# EAGLE board Lilypad_Arduino_USB-Panel-v11 (EAGLE 6.5.0)
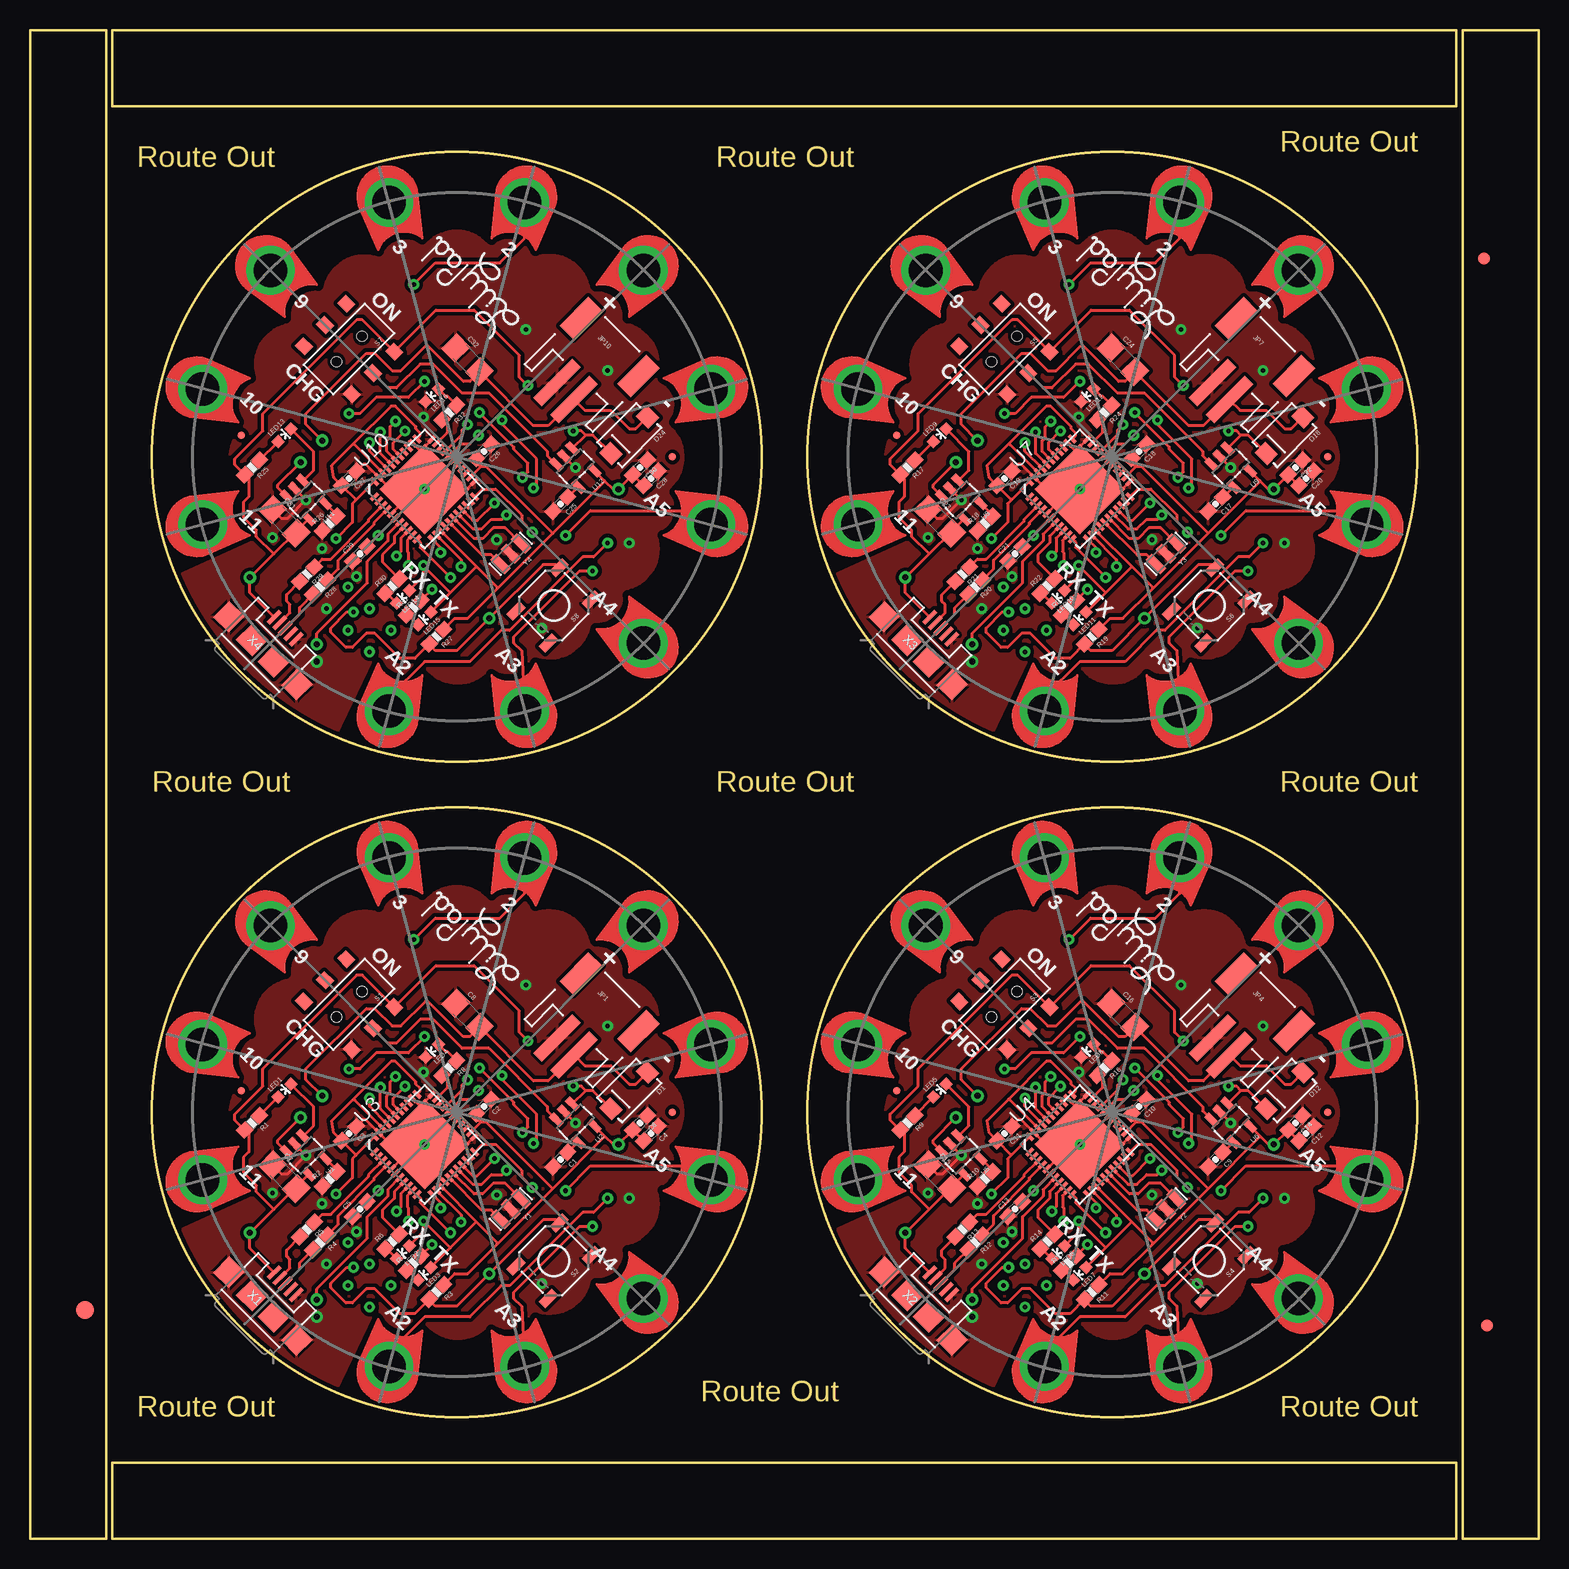
[diagram p0: board, top side]
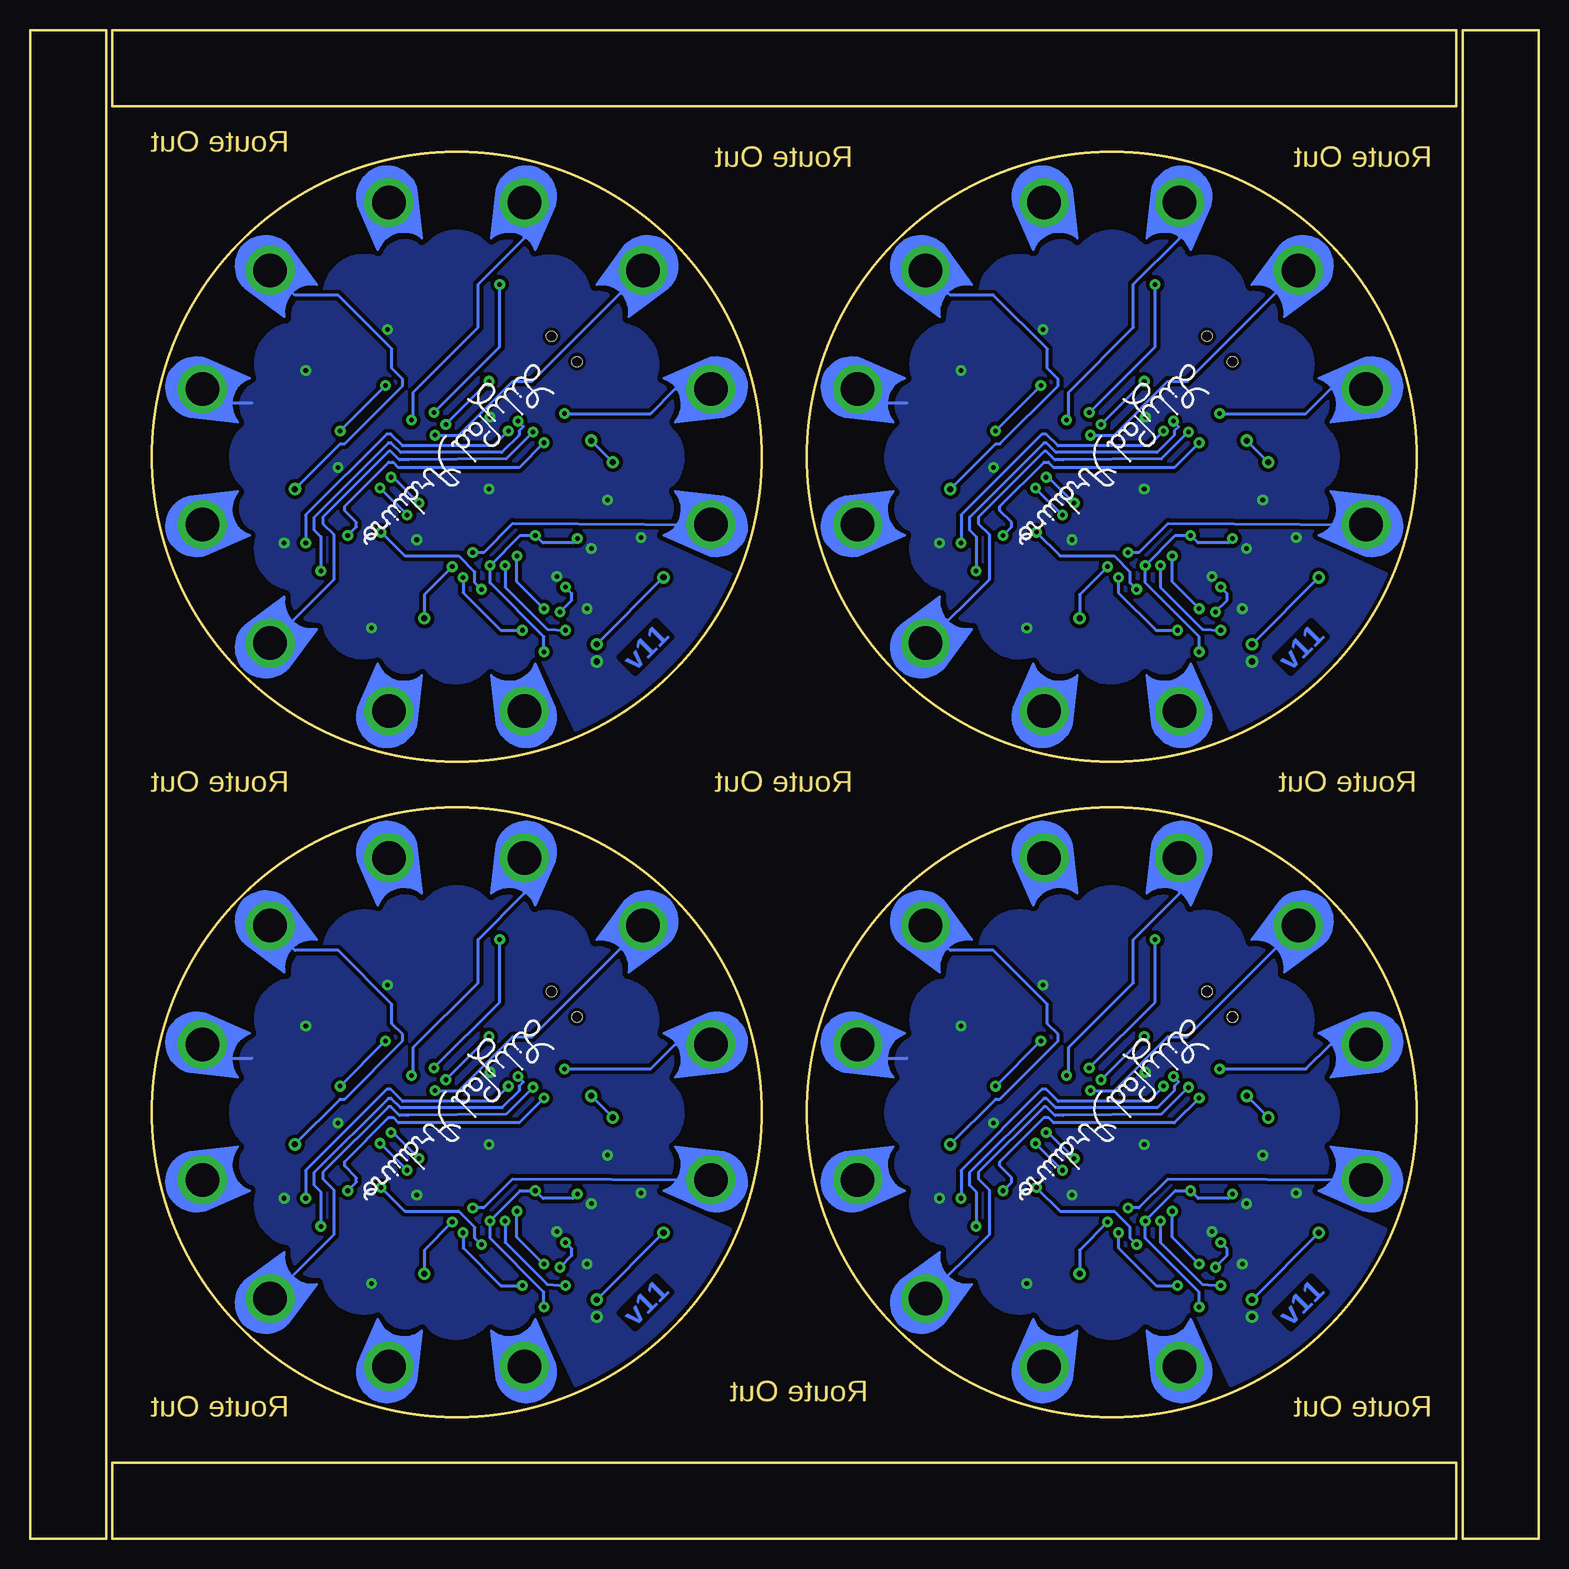
[diagram p1: board, bottom side, seen from below]

Size 125.73 x 125.73 mm. Coordinates in mm from the lower left corner, seen from the top.
Outline: 6.35,99.06 6.35,0 0,0 0,125.73 6.35,125.73 6.35,95.25
Outline: 30.48,6.35 6.86,6.35 6.86,0 118.87,0 118.87,6.35 26.67,6.35
Outline: 119.38,30.48 119.38,0 125.73,0 125.73,125.73 119.38,125.73 119.38,29.21
Outline: 95.25,119.38 118.87,119.38 118.87,125.73 6.86,125.73 6.86,119.38 96.52,119.38
Outline: circle at 35.57,35.56 radius 25.4
Outline: circle at 90.18,35.56 radius 25.4
Outline: circle at 90.18,90.17 radius 25.4
Outline: circle at 35.57,90.17 radius 25.4
Copper layers (1*16): Top 0.035mm / dielectric 1.5mm / Bottom 0.035mm
Design rules "default": minimum track width 8mil, minimum drill 20mil, track to track 8mil, track to pad 8mil, pad to pad 8mil, via to via 8mil, smd to smd 8mil, copper to edge 8mil, drill to drill 8mil, minimum pad ring 12mil, minimum via ring 10mil, stop-mask expansion 4mil, vias tented up to drill 20mil, thermal gap 10mil
tRestrict: area 38.4,10.5 to 45,18.4; area 26.1,52.7 to 32.7,60.6; area 47.2,15.5 to 55.5,24; area 15.6,47.1 to 24,55.6; area 38.5,52.7 to 45.2,60.6; area 10.5,38.5 to 18.4,45.1; area 52.8,26 to 60.7,32.7; area 26,10.5 to 32.7,18.4; area 10.5,26.1 to 18.4,32.7; area 52.7,38.4 to 60.7,45; area 42.1,12.1 to 51.1,21.3; area 32.1,10.1 to 39.1,17.4; 72 more areas
bRestrict: area 47.2,15.5 to 55.5,24; area 15.6,47.1 to 24,55.6; area 38.5,52.7 to 45.2,60.6; area 10.5,38.5 to 18.4,45.1; area 52.8,26 to 60.7,32.7; area 26,10.5 to 32.7,18.4; area 10.5,26.1 to 18.4,32.7; area 52.7,38.4 to 60.7,45; area 42.1,12.1 to 51.1,21.3; area 32.1,10.1 to 39.1,17.4; area 12.1,42.1 to 21.3,51.1; area 10.1,32.1 to 17.4,39.1; 72 more areas

## Footprints (pad centres in the part's own frame; a part is rotated, then mirrored left to right if it is on the bottom)
PETAL-LONG-1-2SIDE = drill 2.794 pad 4.064: 1 0.03,0
0603-CAP = smd 1.1 x 1: 1 -0.85,0; 2 0.85,0
1206 = smd 1.6 x 1.8: 1 -1.4,0; 2 1.4,0
SMA-DIODE = smd 1.27 x 1.47: A -2.15,0; C 2.15,0
FIDUCIAL-1.5X3 = smd 1.5 x 1.5: 1 0,0
FIDUCIAL-1X2 = smd 1 x 1: 1 0,0
JST-2-SMD = smd 1 x 4.6: 1 -1,-3.7; 2 1,-3.7 | smd 1.6 x 3.4: NC1 -3.4,1.5; NC2 3.4,1.5
MICRO-FIDUCIAL = smd 0.635 x 0.635: 1 0,0
LED-0603 = smd 0.8 x 0.8: A 0,-0.75; C 0,0.75
0603-RES = smd 1.1 x 1: 1 -0.85,0; 2 0.85,0
AYZ0202 = smd 1 x 1.15: 1 -2.5,2.825; 2 0,2.825; 3 2.5,2.825; 4 -2.5,-2.825; 5 0,-2.825; 6 2.5,-2.825 | hole 0.85: 1.5,0; -1.5,0
TACTILE_SWITCH_SMD = smd 1.524 x 0.762: 1 -2.54,1.905; 2 2.54,1.905; 3 -2.54,-1.905; 4 2.54,-1.905
SOT23-5 = smd 0.55 x 1.2: 1 -0.95,-1.3; 2 0,-1.3; 3 0.95,-1.3; 4 0.95,1.3; 5 -0.95,1.3
QFN-44 = smd 0.8 x 0.3: 1 -3.4,2.5; 2 -3.4,2; 3 -3.4,1.5; 4 -3.4,1; 5 -3.4,0.5; 6 -3.4,0; 7 -3.4,-0.5; 8 -3.4,-1; 9 -3.4,-1.5; 10 -3.4,-2; 11 -3.4,-2.5; 23 3.4,-2.5; 24 3.4,-2; 25 3.4,-1.5; 26 3.4,-1; 27 3.4,-0.5; 28 3.4,0; 29 3.4,0.5; 30 3.4,1; 31 3.4,1.5; 32 3.4,2; 33 3.4,2.5 | smd 0.3 x 0.8: 12 -2.5,-3.4; 13 -2,-3.4; 14 -1.5,-3.4; 15 -1,-3.4; 16 -0.5,-3.4; 17 0,-3.4; 18 0.5,-3.4; 19 1,-3.4; 20 1.5,-3.4; 21 2,-3.4; 22 2.5,-3.4; 34 2.5,3.4; 35 2,3.4; 36 1.5,3.4; 37 1,3.4; 38 0.5,3.4; 39 0,3.4; 40 -0.5,3.4; 41 -1,3.4; 42 -1.5,3.4; 43 -2,3.4; 44 -2.5,3.4 | smd 5.3 x 5.3: EPAD 0,0
USB-MICROB = smd 0.35 x 1.4: D+ 0,2.65; D- -0.65,2.65; GND 1.3,2.65; ID 0.65,2.65; VBUS -1.3,2.65 | smd 1.8 x 1.9: MT1 -4,0; MT2 4,0 | smd 1.9 x 1.9: P$1 -1.27,0; P$2 1.27,0
RESONATOR-SMD = smd 0.7 x 1.7: 1 -1.2,0; 2 0,0; 3 1.2,0

## Placement (x,y rotation side)
+  SEWTAP9  [PETAL-LONG-1-2SIDE]  51.13,51.11 225 top
+1  SEWTAP9  [PETAL-LONG-1-2SIDE]  105.74,51.11 225 top
+2  SEWTAP9  [PETAL-LONG-1-2SIDE]  105.74,105.72 225 top
+3  SEWTAP9  [PETAL-LONG-1-2SIDE]  51.13,105.72 225 top
-  SEWTAP9  [PETAL-LONG-1-2SIDE]  56.78,41.21 195 top
-1  SEWTAP9  [PETAL-LONG-1-2SIDE]  111.39,41.21 195 top
-2  SEWTAP9  [PETAL-LONG-1-2SIDE]  111.39,95.82 195 top
-3  SEWTAP9  [PETAL-LONG-1-2SIDE]  56.78,95.82 195 top
A1  SEWTAP9  [PETAL-LONG-1-2SIDE]  84.52,14.34 75 top
A2  SEWTAP9  [PETAL-LONG-1-2SIDE]  29.91,14.34 75 top
A3  SEWTAP9  [PETAL-LONG-1-2SIDE]  41.23,14.34 105 top
A4  SEWTAP9  [PETAL-LONG-1-2SIDE]  51.13,20 135 top
A5  SEWTAP9  [PETAL-LONG-1-2SIDE]  56.78,29.9 165 top
A6  SEWTAP9  [PETAL-LONG-1-2SIDE]  95.84,14.34 105 top
A7  SEWTAP9  [PETAL-LONG-1-2SIDE]  111.39,29.9 165 top
A8  SEWTAP9  [PETAL-LONG-1-2SIDE]  105.74,20 135 top
A9  SEWTAP9  [PETAL-LONG-1-2SIDE]  84.52,68.95 75 top
A10  SEWTAP9  [PETAL-LONG-1-2SIDE]  95.84,68.95 105 top
A11  SEWTAP9  [PETAL-LONG-1-2SIDE]  111.39,84.51 165 top
A12  SEWTAP9  [PETAL-LONG-1-2SIDE]  105.74,74.61 135 top
A13  SEWTAP9  [PETAL-LONG-1-2SIDE]  29.91,68.95 75 top
A14  SEWTAP9  [PETAL-LONG-1-2SIDE]  41.23,68.95 105 top
A15  SEWTAP9  [PETAL-LONG-1-2SIDE]  56.78,84.51 165 top
A16  SEWTAP9  [PETAL-LONG-1-2SIDE]  51.13,74.61 135 top
C1  470pF  [0603-CAP]  44.19,31.61 225 top
C2  .1uF  [0603-CAP]  37.82,36.01 225 top
C3  .1uF  [0603-CAP]  26.59,33.76 225 top
C4  .1uF  [0603-CAP]  51.73,33.76 225 top
C5  1uF  [0603-CAP]  27.49,27.47 45 top
C6  4.7uF  [0603-CAP]  50.84,34.66 225 top
C7  4.7uF  [1206]  21.2,30.17 315 top
C8  4.7uF  [1206]  36.47,43.64 315 top
C9  470pF  [0603-CAP]  98.8,31.61 225 top
C10  .1uF  [0603-CAP]  92.43,36.01 225 top
C11  .1uF  [0603-CAP]  81.2,33.76 225 top
C12  .1uF  [0603-CAP]  106.34,33.76 225 top
C13  1uF  [0603-CAP]  82.1,27.47 45 top
C14  4.7uF  [0603-CAP]  105.45,34.66 225 top
C15  4.7uF  [1206]  75.81,30.17 315 top
C16  4.7uF  [1206]  91.08,43.64 315 top
C17  470pF  [0603-CAP]  98.8,86.22 225 top
C18  .1uF  [0603-CAP]  92.43,90.62 225 top
C19  .1uF  [0603-CAP]  81.2,88.37 225 top
C20  .1uF  [0603-CAP]  106.34,88.37 225 top
C21  1uF  [0603-CAP]  82.1,82.08 45 top
C22  4.7uF  [0603-CAP]  105.45,89.27 225 top
C23  4.7uF  [1206]  75.81,84.78 315 top
C24  4.7uF  [1206]  91.08,98.25 315 top
C25  470pF  [0603-CAP]  44.19,86.22 225 top
C26  .1uF  [0603-CAP]  37.82,90.62 225 top
C27  .1uF  [0603-CAP]  26.59,88.37 225 top
C28  .1uF  [0603-CAP]  51.73,88.37 225 top
C29  1uF  [0603-CAP]  27.49,82.08 45 top
C30  4.7uF  [0603-CAP]  50.84,89.27 225 top
C31  4.7uF  [1206]  21.2,84.78 315 top
C32  4.7uF  [1206]  36.47,98.25 315 top
D1  B340A  [SMA-DIODE]  49.94,37.35 225 top
D2  SEWTAP9  [PETAL-LONG-1-2SIDE]  95.84,56.77 255 top
D3  SEWTAP9  [PETAL-LONG-1-2SIDE]  74.62,51.11 315 top
D4  SEWTAP9  [PETAL-LONG-1-2SIDE]  84.52,56.77 285 top
D5  SEWTAP9  [PETAL-LONG-1-2SIDE]  41.23,56.77 255 top
D6  SEWTAP9  [PETAL-LONG-1-2SIDE]  29.91,56.77 285 top
D7  SEWTAP9  [PETAL-LONG-1-2SIDE]  68.97,41.21 345 top
D8  SEWTAP9  [PETAL-LONG-1-2SIDE]  68.97,29.9 15 top
D9  SEWTAP9  [PETAL-LONG-1-2SIDE]  20.01,51.11 315 top
D10  SEWTAP9  [PETAL-LONG-1-2SIDE]  14.36,41.21 345 top
D11  SEWTAP9  [PETAL-LONG-1-2SIDE]  14.36,29.9 15 top
D12  B340A  [SMA-DIODE]  104.55,37.35 225 top
D13  SEWTAP9  [PETAL-LONG-1-2SIDE]  95.84,111.38 255 top
D14  SEWTAP9  [PETAL-LONG-1-2SIDE]  74.62,105.72 315 top
D15  SEWTAP9  [PETAL-LONG-1-2SIDE]  84.52,111.38 285 top
D16  SEWTAP9  [PETAL-LONG-1-2SIDE]  68.97,95.82 345 top
D17  SEWTAP9  [PETAL-LONG-1-2SIDE]  68.97,84.51 15 top
D18  B340A  [SMA-DIODE]  104.55,91.96 225 top
D19  SEWTAP9  [PETAL-LONG-1-2SIDE]  41.23,111.38 255 top
D20  SEWTAP9  [PETAL-LONG-1-2SIDE]  20.01,105.72 315 top
D21  SEWTAP9  [PETAL-LONG-1-2SIDE]  29.91,111.38 285 top
D22  SEWTAP9  [PETAL-LONG-1-2SIDE]  14.36,95.82 345 top
D23  SEWTAP9  [PETAL-LONG-1-2SIDE]  14.36,84.51 15 top
D24  B340A  [SMA-DIODE]  49.94,91.96 225 top
E$1  [FIDUCIAL-1.5X3]  4.57,19.05 0 top
E$4  [FIDUCIAL-1X2]  121.41,17.78 0 top
E$5  [FIDUCIAL-1X2]  121.16,106.68 180 top
JP1  JST-2  [JST-2-SMD]  47.24,43.64 315 top
JP2  FIDUCIALUFIDUCIAL  [MICRO-FIDUCIAL]  53.53,35.56 135 top
JP3  FIDUCIALUFIDUCIAL  [MICRO-FIDUCIAL]  17.61,37.35 135 top
JP4  JST-2  [JST-2-SMD]  101.85,43.64 315 top
JP5  FIDUCIALUFIDUCIAL  [MICRO-FIDUCIAL]  108.14,35.56 135 top
JP6  FIDUCIALUFIDUCIAL  [MICRO-FIDUCIAL]  72.22,37.35 135 top
JP7  JST-2  [JST-2-SMD]  101.85,98.25 315 top
JP8  FIDUCIALUFIDUCIAL  [MICRO-FIDUCIAL]  108.14,90.17 135 top
JP9  FIDUCIALUFIDUCIAL  [MICRO-FIDUCIAL]  72.22,91.96 135 top
JP10  JST-2  [JST-2-SMD]  47.24,98.25 315 top
JP11  FIDUCIALUFIDUCIAL  [MICRO-FIDUCIAL]  53.53,90.17 135 top
JP12  FIDUCIALUFIDUCIAL  [MICRO-FIDUCIAL]  17.61,91.96 135 top
LED1  RED  [LED-0603]  21.2,37.35 315 top
LED2  RED  [LED-0603]  31.08,23.88 135 top
LED3  RED  [LED-0603]  32.88,22.09 135 top
LED4  RED  [LED-0603]  33.5,40.68 135 top
LED5  RED  [LED-0603]  75.81,37.35 315 top
LED6  RED  [LED-0603]  85.69,23.88 135 top
LED7  RED  [LED-0603]  87.49,22.09 135 top
LED8  RED  [LED-0603]  88.11,40.68 135 top
LED9  RED  [LED-0603]  75.81,91.96 315 top
LED10  RED  [LED-0603]  85.69,78.49 135 top
LED11  RED  [LED-0603]  87.49,76.7 135 top
LED12  RED  [LED-0603]  88.11,95.29 135 top
LED13  RED  [LED-0603]  21.2,91.96 315 top
LED14  RED  [LED-0603]  31.08,78.49 135 top
LED15  RED  [LED-0603]  32.88,76.7 135 top
LED16  RED  [LED-0603]  33.5,95.29 135 top
R1  330  [0603-RES]  18.51,34.66 225 top
R2  10k  [0603-RES]  24.97,29.99 45 top
R3  10k  [0603-RES]  33.86,20.56 225 top
R4  22  [0603-RES]  24.17,24.69 225 top
R5  22  [0603-RES]  23.09,25.77 225 top
R6  330  [0603-RES]  30.18,24.78 45 top
R7  330  [0603-RES]  31.98,22.98 45 top
R8  330  [0603-RES]  34.94,39.24 225 top
R9  330  [0603-RES]  73.12,34.66 225 top
R10  10k  [0603-RES]  79.58,29.99 45 top
R11  10k  [0603-RES]  88.47,20.56 225 top
R12  22  [0603-RES]  78.78,24.69 225 top
R13  22  [0603-RES]  77.7,25.77 225 top
R14  330  [0603-RES]  84.79,24.78 45 top
R15  330  [0603-RES]  86.59,22.98 45 top
R16  330  [0603-RES]  89.55,39.24 225 top
R17  330  [0603-RES]  73.12,89.27 225 top
R18  10k  [0603-RES]  79.58,84.6 45 top
R19  10k  [0603-RES]  88.47,75.17 225 top
R20  22  [0603-RES]  78.78,79.3 225 top
R21  22  [0603-RES]  77.7,80.38 225 top
R22  330  [0603-RES]  84.79,79.39 45 top
R23  330  [0603-RES]  86.59,77.59 45 top
R24  330  [0603-RES]  89.55,93.85 225 top
R25  330  [0603-RES]  18.51,89.27 225 top
R26  10k  [0603-RES]  24.97,84.6 45 top
R27  10k  [0603-RES]  33.86,75.17 225 top
R28  22  [0603-RES]  24.17,79.3 225 top
R29  22  [0603-RES]  23.09,80.38 225 top
R30  330  [0603-RES]  30.18,79.39 45 top
R31  330  [0603-RES]  31.98,77.59 45 top
R32  330  [0603-RES]  34.94,93.85 225 top
S1  SWITCH-DPDTSMD  [AYZ0202]  26.59,44.54 225 top
S2  !RESET  [TACTILE_SWITCH_SMD]  43.65,23.16 225 top
S3  SWITCH-DPDTSMD  [AYZ0202]  81.2,44.54 225 top
S4  !RESET  [TACTILE_SWITCH_SMD]  98.26,23.16 225 top
S5  SWITCH-DPDTSMD  [AYZ0202]  81.2,99.15 225 top
S6  !RESET  [TACTILE_SWITCH_SMD]  98.26,77.77 225 top
S7  SWITCH-DPDTSMD  [AYZ0202]  26.59,99.15 225 top
S8  !RESET  [TACTILE_SWITCH_SMD]  43.65,77.77 225 top
U1  MCP73831  [SOT23-5]  23,31.96 225 top
U2  MIC5219  [SOT23-5]  45.45,34.66 225 top
U3  ATMEGA32U4QFN  [QFN-44]  32.88,32.86 45 top
U4  ATMEGA32U4QFN  [QFN-44]  87.49,32.86 45 top
U5  MCP73831  [SOT23-5]  77.61,31.96 225 top
U6  MIC5219  [SOT23-5]  100.06,34.66 225 top
U7  ATMEGA32U4QFN  [QFN-44]  87.49,87.47 45 top
U8  MCP73831  [SOT23-5]  77.61,86.57 225 top
U9  MIC5219  [SOT23-5]  100.06,89.27 225 top
U10  ATMEGA32U4QFN  [QFN-44]  32.88,87.47 45 top
U11  MCP73831  [SOT23-5]  23,86.57 225 top
U12  MIC5219  [SOT23-5]  45.45,89.27 225 top
U$1  LOGO-LPLPA  [LOGO-LPA]  35.57,35.56 225 bottom
U$2  LOGO-LPLP  [LOGO-LILYPAD]  91.35,49.84 135 top
U$3  LOGO-LPLPA  [LOGO-LPA]  90.18,35.56 225 bottom
U$4  LOGO-LPLP  [LOGO-LILYPAD]  91.35,104.45 135 top
U$5  LOGO-LPLPA  [LOGO-LPA]  90.18,90.17 225 bottom
U$6  LOGO-LPLP  [LOGO-LILYPAD]  36.74,104.45 135 top
U$7  LOGO-LPLPA  [LOGO-LPA]  35.57,90.17 225 bottom
U$13  LOGO-LPLP  [LOGO-LILYPAD]  36.74,49.84 135 top
X1  USB-MICROB  [USB-MICROB]  19.41,19.39 315 top
X2  USB-MICROB  [USB-MICROB]  74.02,19.39 315 top
X3  USB-MICROB  [USB-MICROB]  74.02,74 315 top
X4  USB-MICROB  [USB-MICROB]  19.41,74 315 top
Y1  8MHz  [RESONATOR-SMD]  40.06,27.47 225 top
Y2  8MHz  [RESONATOR-SMD]  94.67,27.47 225 top
Y3  8MHz  [RESONATOR-SMD]  94.67,82.08 225 top
Y4  8MHz  [RESONATOR-SMD]  40.06,82.08 225 top

## Library data of the parts
+ +1-+3 - -1--3 A1-A16 D2-D11 D13-D17 D19-D23 U$2 U$4 U$6 U$13 = LilyPad-Wearables; NO_PART: 1
C1 C9 C17 C25 = SparkFun-Passives; PROD_ID: CAP-07884
C2-C4 C10-C12 C18-C20 C26-C28 = SparkFun-Passives; PROD_ID: CAP-00810
C5 C13 C21 C29 = SparkFun-Passives; PROD_ID: CAP-00868
C6 C14 C22 C30 = SparkFun-Passives; PROD_ID: CAP-08280
C7 C8 C15 C16 C23 C24 C31 C32 = SparkFun-Passives; PROD_ID: CAP-10300
D1 D12 D18 D24 = SparkFun-DiscreteSemi; PROD_ID: DIO-09886
E$1 E$4 E$5 = SparkFun-Aesthetics
JP1 JP4 JP7 JP10 = SparkFun-Connectors; PROD_ID: CONN-08352
JP2 JP3 JP5 JP6 JP8 JP9 JP11 JP12 = SparkFun
LED1-LED16 = SparkFun-LED; PROD_ID: DIO-00819
R1 R6-R9 R14-R17 R22-R25 R30-R32 = SparkFun-Passives; PROD_ID: RES-00818
R2 R3 R10 R11 R18 R19 R26 R27 = SparkFun-Passives; PROD_ID: RES-00824
R4 R5 R12 R13 R20 R21 R28 R29 = SparkFun-Passives; PROD_ID: RES-08698
S1 S3 S5 S7 = SparkFun-Electromechanical; PROD_ID: SWCH-08179
S2 S4 S6 S8 = SparkFun-Electromechanical; PROD_ID: SWCH-08247
U1 U5 U8 U11 = SparkFun-PowerIC; PROD_ID: IC-09995
U2 U6 U9 U12 = SparkFun-PowerIC; PROD_ID: VREG-09872
U3 U4 U7 U10 = SparkFun-DigitalIC; PROD_ID: IC-10828
U$1 U$3 U$5 U$7 = LilyPad-Wearables
X1-X4 = SparkFun-Connectors; PROD_ID: CONN-09505
Y1-Y4 = SparkFun-FreqCtrl; PROD_ID: XTAL-08895

## Nets
3.3V: +.1 C2.2 C3.2 C4.2 C5.2 C6.2 LED2.A LED3.A R3.1 U2.5 U3.6 U3.14 U3.24 U3.34 U3.42 U3.44
3.3V1: +1.1 C10.2 C11.2 C12.2 C13.2 C14.2 LED6.A LED7.A R11.1 U4.6 U4.14 U4.24 U4.34 U4.42 U4.44 U6.5
3.3V2: +2.1 C18.2 C19.2 C20.2 C21.2 C22.2 LED10.A LED11.A R19.1 U7.6 U7.14 U7.24 U7.34 U7.42 U7.44 U9.5
3.3V3: +3.1 C26.2 C27.2 C28.2 C29.2 C30.2 LED14.A LED15.A R27.1 U10.6 U10.14 U10.24 U10.34 U10.42 U10.44 U12.5
5V: C7.2 D1.C R1.2 S1.1 U1.4 U2.1 U3.7 X1.VBUS
5V1: C15.2 D12.C R9.2 S3.1 U4.7 U5.4 U6.1 X2.VBUS
5V2: C23.2 D18.C R17.2 S5.1 U7.7 U8.4 U9.1 X3.VBUS
5V3: C31.2 D24.C R25.2 S7.1 U10.7 U11.4 U12.1 X4.VBUS
D+: R4.1 U3.4
D+1: R12.1 U4.4
D+2: R20.1 U7.4
D+3: R28.1 U10.4
D-: R5.1 U3.3
D-1: R13.1 U4.3
D-2: R21.1 U7.3
D-3: R29.1 U10.3
GND: -.1 C1.2 C2.1 C3.1 C4.1 C5.1 C6.1 C7.1 C8.1 JP1.1 LED4.C R2.1 S1.3 S2.1 U1.2 U2.2 U3.5 U3.15 U3.23 U3.33 U3.35 U3.43 U3.EPAD X1.GND X1.MT1 X1.MT2 Y1.2
GND1: -1.1 C9.2 C10.1 C11.1 C12.1 C13.1 C14.1 C15.1 C16.1 JP4.1 LED8.C R10.1 S3.3 S4.1 U4.5 U4.15 U4.23 U4.33 U4.35 U4.43 U4.EPAD U5.2 U6.2 X2.GND X2.MT1 X2.MT2 Y2.2
GND2: -2.1 C17.2 C18.1 C19.1 C20.1 C21.1 C22.1 C23.1 C24.1 JP7.1 LED12.C R18.1 S5.3 S6.1 U7.5 U7.15 U7.23 U7.33 U7.35 U7.43 U7.EPAD U8.2 U9.2 X3.GND X3.MT1 X3.MT2 Y3.2
GND3: -3.1 C25.2 C26.1 C27.1 C28.1 C29.1 C30.1 C31.1 C32.1 JP10.1 LED16.C R26.1 S7.3 S8.1 U10.5 U10.15 U10.23 U10.33 U10.35 U10.43 U10.EPAD U11.2 U12.2 X4.GND X4.MT1 X4.MT2 Y4.2
MISO: U3.11
MISO1: U4.11
MISO2: U7.11
MISO3: U10.11
MOSI: U3.10
MOSI1: U4.10
MOSI2: U7.10
MOSI3: U10.10
N$1: LED2.C R6.1
N$2: S1.2 U2.3
N$3: LED1.A R1.1
N$4: LED1.C U1.1
N$5: U3.17 Y1.1
N$6: R2.2 U1.5
N$7: U3.16 Y1.3
N$8: C1.1 U2.4
N$9: D11.1 U3.12
N$10: D10.1 U3.30
N$11: D9.1 U3.29
N$12: D5.1 U3.19
N$13: D6.1 U3.18
N$14: A5.1 U3.41
N$15: A4.1 U3.40
N$16: A3.1 U3.39
N$17: A2.1 U3.38
N$18: LED4.A R8.1
N$19: R5.2 X1.D-
N$20: R4.2 X1.D+
N$21: LED3.C R7.1
N$22: S3.2 U6.3
N$23: LED5.A R9.1
N$24: LED5.C U5.1
N$25: R10.2 U5.5
N$26: C9.1 U6.4
N$27: D8.1 U4.12
N$28: D7.1 U4.30
N$29: D3.1 U4.29
N$30: A7.1 U4.41
N$31: A8.1 U4.40
N$32: A6.1 U4.39
N$33: A1.1 U4.38
N$34: R13.2 X2.D-
N$35: R12.2 X2.D+
N$36: LED6.C R14.1
N$37: LED7.C R15.1
N$38: U4.17 Y2.1
N$39: U4.16 Y2.3
N$40: D2.1 U4.19
N$41: D4.1 U4.18
N$42: LED8.A R16.1
N$43: S5.2 U9.3
N$44: LED9.A R17.1
N$45: LED9.C U8.1
N$46: R18.2 U8.5
N$47: C17.1 U9.4
N$48: D17.1 U7.12
N$49: D16.1 U7.30
N$50: D14.1 U7.29
N$51: A11.1 U7.41
N$52: A12.1 U7.40
N$53: A10.1 U7.39
N$54: A9.1 U7.38
N$55: R21.2 X3.D-
N$56: R20.2 X3.D+
N$57: LED10.C R22.1
N$58: LED11.C R23.1
N$59: U7.17 Y3.1
N$60: U7.16 Y3.3
N$61: D13.1 U7.19
N$62: D15.1 U7.18
N$63: LED12.A R24.1
N$64: S7.2 U12.3
N$65: LED13.A R25.1
N$66: LED13.C U11.1
N$67: R26.2 U11.5
N$68: C25.1 U12.4
N$69: D23.1 U10.12
N$70: D22.1 U10.30
N$71: D20.1 U10.29
N$72: A15.1 U10.41
N$73: A16.1 U10.40
N$74: A14.1 U10.39
N$75: A13.1 U10.38
N$76: R29.2 X4.D-
N$77: R28.2 X4.D+
N$78: LED14.C R30.1
N$79: LED15.C R31.1
N$80: U10.17 Y4.1
N$81: U10.16 Y4.3
N$82: D19.1 U10.19
N$83: D21.1 U10.18
N$84: LED16.A R32.1
RESET: R3.2 S2.3 U3.13
RESET1: R11.2 S4.3 U4.13
RESET2: R19.2 S6.3 U7.13
RESET3: R27.2 S8.3 U10.13
RX_LED: R6.2 U3.8
RX_LED1: R14.2 U4.8
RX_LED2: R22.2 U7.8
RX_LED3: R30.2 U10.8
SCK: U3.9
SCK1: U4.9
SCK2: U7.9
SCK3: U10.9
TX_LED: R7.2 U3.22
TX_LED1: R15.2 U4.22
TX_LED2: R23.2 U7.22
TX_LED3: R31.2 U10.22
USER_LED: R8.2 U3.32
USER_LED1: R16.2 U4.32
USER_LED2: R24.2 U7.32
USER_LED3: R32.2 U10.32
V_BATT: C8.2 D1.A JP1.2 U1.3
V_BATT1: C16.2 D12.A JP4.2 U5.3
V_BATT2: C24.2 D18.A JP7.2 U8.3
V_BATT3: C32.2 D24.A JP10.2 U11.3

## Tracks (layer width: path | path; a pad name or v marks a point on that pad's centre or on a via)
3.3V  (via drill 0.38, 0.51)
  Top 0.254: 47.25,34.21 U2.5 47.87,33.58 | 43.56,29.18 47.87,33.49 47.87,33.58 | U3.44 27.15,31.94 | 27.15,31.94 26.86,31.66 26.86,30.08 v25.51,28.73 | 26.95,36.64 30.09,39.78 30.45,39.78 32.16,38.07 32.16,37.89 32.52,37.53 32.52,37.31 U3.34 | 26.95,36.64 25.15,34.84 25.33,33.82 C3.2 27.13,32.02 27.13,31.97 27.15,31.94 | U3.42 27.07,36.55 26.95,36.64 | U3.6 v29.02,29 C5.2 | LED3.A 35.03,24.24 | 35.03,24.24 37.19,26.4 37.19,26.43 | U3.14 37.19,26.43 | LED2.A 32.79,25.59 v32.79,26.49 35.03,24.24 | 47.87,33.58 48.59,32.86 v49.04,32.86 C6.2 C4.2 | R3.1 35.39,22.09 36.47,22.09 38.89,24.51 | 38.89,24.51 43.56,29.18 | 37.19,26.43 38.89,24.73 38.89,24.51 | C2.2 37.1,35.29 37.1,34.93 37.19,34.84 37.5,34.84 37.59,34.75 | 43.56,29.18 38,34.75 37.59,34.75 | U3.24 37.59,34.75
  Bottom 0.254: v25.51,28.73 25.87,28.37 28.39,28.37 v29.02,29 30.27,29 v32.79,26.49 32.79,25.05 28.3,20.56 v28.3,19.3 | v49.04,32.86 45.27,36.64 44.91,36.64 40.06,41.48 40.06,42.02 40.96,42.92 40.96,44.54 45.45,49.03 49.04,49.03 +.1
3.3V1  (via drill 0.38, 0.51)
  Top 0.254: 101.86,34.21 U6.5 102.48,33.58 | 98.17,29.18 102.48,33.49 102.48,33.58 | U4.44 81.76,31.94 | 81.76,31.94 81.47,31.66 81.47,30.08 v80.12,28.73 | 81.56,36.64 84.7,39.78 85.06,39.78 86.77,38.07 86.77,37.89 87.13,37.53 87.13,37.31 U4.34 | 81.56,36.64 79.76,34.84 79.94,33.82 C11.2 81.74,32.02 81.74,31.97 81.76,31.94 | U4.42 81.68,36.55 81.56,36.64 | U4.6 v83.62,29 C13.2 | LED7.A 89.64,24.24 | 89.64,24.24 91.8,26.4 91.8,26.43 | U4.14 91.8,26.43 | LED6.A 87.4,25.59 v87.4,26.49 89.64,24.24 | 102.48,33.58 103.2,32.86 v103.65,32.86 C14.2 C12.2 | R11.1 90,22.09 91.08,22.09 93.5,24.51 | 93.5,24.51 98.17,29.18 | 91.8,26.43 93.5,24.73 93.5,24.51 | C10.2 91.71,35.29 91.71,34.93 91.8,34.84 92.11,34.84 92.2,34.75 | 98.17,29.18 92.61,34.75 92.2,34.75 | U4.24 92.2,34.75
  Bottom 0.254: v80.12,28.73 80.48,28.37 83,28.37 v83.62,29 84.88,29 v87.4,26.49 87.4,25.05 82.91,20.56 v82.91,19.3 | v103.65,32.86 99.88,36.64 99.52,36.64 94.67,41.48 94.67,42.02 95.57,42.92 95.57,44.54 100.06,49.03 103.65,49.03 +1.1
3.3V2  (via drill 0.38, 0.51)
  Top 0.254: 101.86,88.82 U9.5 102.48,88.19 | 98.17,83.79 102.48,88.1 102.48,88.19 | U7.44 81.76,86.55 | 81.76,86.55 81.47,86.27 81.47,84.69 v80.12,83.34 | 81.56,91.25 84.7,94.39 85.06,94.39 86.77,92.68 86.77,92.5 87.13,92.14 87.13,91.92 U7.34 | 81.56,91.25 79.76,89.45 79.94,88.43 C19.2 81.74,86.63 81.74,86.58 81.76,86.55 | U7.42 81.68,91.16 81.56,91.25 | U7.6 v83.62,83.61 C21.2 | LED11.A 89.64,78.85 | 89.64,78.85 91.8,81.01 91.8,81.04 | U7.14 91.8,81.04 | LED10.A 87.4,80.2 v87.4,81.1 89.64,78.85 | 102.48,88.19 103.2,87.47 v103.65,87.47 C22.2 C20.2 | R19.1 90,76.7 91.08,76.7 93.5,79.12 | 93.5,79.12 98.17,83.79 | 91.8,81.04 93.5,79.34 93.5,79.12 | C18.2 91.71,89.9 91.71,89.54 91.8,89.45 92.11,89.45 92.2,89.36 | 98.17,83.79 92.61,89.36 92.2,89.36 | U7.24 92.2,89.36
  Bottom 0.254: v80.12,83.34 80.48,82.98 83,82.98 v83.62,83.61 84.88,83.61 v87.4,81.1 87.4,79.66 82.91,75.17 v82.91,73.91 | v103.65,87.47 99.88,91.25 99.52,91.25 94.67,96.09 94.67,96.63 95.57,97.53 95.57,99.15 100.06,103.64 103.65,103.64 +2.1
3.3V3  (via drill 0.38, 0.51)
  Top 0.254: 47.25,88.82 U12.5 47.87,88.19 | 43.56,83.79 47.87,88.1 47.87,88.19 | U10.44 27.15,86.55 | 27.15,86.55 26.86,86.27 26.86,84.69 v25.51,83.34 | 26.95,91.25 30.09,94.39 30.45,94.39 32.16,92.68 32.16,92.5 32.52,92.14 32.52,91.92 U10.34 | 26.95,91.25 25.15,89.45 25.33,88.43 C27.2 27.13,86.63 27.13,86.58 27.15,86.55 | U10.42 27.07,91.16 26.95,91.25 | U10.6 v29.02,83.61 C29.2 | LED15.A 35.03,78.85 | 35.03,78.85 37.19,81.01 37.19,81.04 | U10.14 37.19,81.04 | LED14.A 32.79,80.2 v32.79,81.1 35.03,78.85 | 47.87,88.19 48.59,87.47 v49.04,87.47 C30.2 C28.2 | R27.1 35.39,76.7 36.47,76.7 38.89,79.12 | 38.89,79.12 43.56,83.79 | 37.19,81.04 38.89,79.34 38.89,79.12 | C26.2 37.1,89.9 37.1,89.54 37.19,89.45 37.5,89.45 37.59,89.36 | 43.56,83.79 38,89.36 37.59,89.36 | U10.24 37.59,89.36
  Bottom 0.254: v25.51,83.34 25.87,82.98 28.39,82.98 v29.02,83.61 30.27,83.61 v32.79,81.1 32.79,79.66 28.3,75.17 v28.3,73.91 | v49.04,87.47 45.27,91.25 44.91,91.25 40.06,96.09 40.06,96.63 40.96,97.53 40.96,99.15 45.45,103.64 49.04,103.64 +3.1
5V  (via drill 0.38, 0.51)
  Top 0.254: U1.4 22.19,29.32 | 22.19,29.32 C7.2 | U3.7 29.82,29.1 29.82,28.55 28.12,26.85 28.12,25.05 23.9,20.83 v23.9,19.93 | 20.33,27.45 18.87,28.91 18.87,29.45 17.79,30.53 17.79,31.79 18.24,32.23 18.24,33.73 R1.2 17.07,34.89 17.07,35.38 19.41,37.71 19.41,39.15 27.22,46.96 27.7,46.96 S1.1 33.82,47.77 37.01,47.77 40.78,44 40.78,42.2 v41.5,41.48 | D1.C 46.9,37.35 46.3,37.35 | U2.1 46.3,37.35 | 46.3,37.35 45.95,37.71 v45.27,37.71 | X1.VBUS 18.33,24.22 18.33,25.46 | 22.19,29.32 20.33,27.45 | 20.33,27.45 18.33,25.46 | 18.33,25.46 v18.33,25.5
  Bottom 0.254: v45.27,37.71 v41.5,41.48 | v18.33,25.5 v23.9,19.93
5V1  (via drill 0.38, 0.51)
  Top 0.254: U5.4 76.8,29.32 | 76.8,29.32 C15.2 | U4.7 84.43,29.1 84.43,28.55 82.73,26.85 82.73,25.05 78.51,20.83 v78.51,19.93 | 74.94,27.45 73.48,28.91 73.48,29.45 72.4,30.53 72.4,31.79 72.85,32.23 72.85,33.73 R9.2 71.68,34.89 71.68,35.38 74.02,37.71 74.02,39.15 81.83,46.96 82.31,46.96 S3.1 88.43,47.77 91.62,47.77 95.39,44 95.39,42.2 v96.11,41.48 | D12.C 101.51,37.35 100.91,37.35 | U6.1 100.91,37.35 | 100.91,37.35 100.56,37.71 v99.88,37.71 | X2.VBUS 72.94,24.22 72.94,25.46 | 76.8,29.32 74.94,27.45 | 74.94,27.45 72.94,25.46 | 72.94,25.46 v72.94,25.5
  Bottom 0.254: v99.88,37.71 v96.11,41.48 | v72.94,25.5 v78.51,19.93
5V2  (via drill 0.38, 0.51)
  Top 0.254: U8.4 76.8,83.93 | 76.8,83.93 C23.2 | U7.7 84.43,83.71 84.43,83.16 82.73,81.46 82.73,79.66 78.51,75.44 v78.51,74.54 | 74.94,82.06 73.48,83.52 73.48,84.06 72.4,85.14 72.4,86.4 72.85,86.84 72.85,88.34 R17.2 71.68,89.5 71.68,89.99 74.02,92.32 74.02,93.76 81.83,101.57 82.31,101.57 S5.1 88.43,102.38 91.62,102.38 95.39,98.61 95.39,96.81 v96.11,96.09 | D18.C 101.51,91.96 100.91,91.96 | U9.1 100.91,91.96 | 100.91,91.96 100.56,92.32 v99.88,92.32 | X3.VBUS 72.94,78.83 72.94,80.07 | 76.8,83.93 74.94,82.06 | 74.94,82.06 72.94,80.07 | 72.94,80.07 v72.94,80.11
  Bottom 0.254: v99.88,92.32 v96.11,96.09 | v72.94,80.11 v78.51,74.54
5V3  (via drill 0.38, 0.51)
  Top 0.254: U11.4 22.19,83.93 | 22.19,83.93 C31.2 | U10.7 29.82,83.71 29.82,83.16 28.12,81.46 28.12,79.66 23.9,75.44 v23.9,74.54 | 20.33,82.06 18.87,83.52 18.87,84.06 17.79,85.14 17.79,86.4 18.24,86.84 18.24,88.34 R25.2 17.07,89.5 17.07,89.99 19.41,92.32 19.41,93.76 27.22,101.57 27.7,101.57 S7.1 33.82,102.38 37.01,102.38 40.78,98.61 40.78,96.81 v41.5,96.09 | D24.C 46.9,91.96 46.3,91.96 | U12.1 46.3,91.96 | 46.3,91.96 45.95,92.32 v45.27,92.32 | X4.VBUS 18.33,78.83 18.33,80.07 | 22.19,83.93 20.33,82.06 | 20.33,82.06 18.33,80.07 | 18.33,80.07 v18.33,80.11
  Bottom 0.254: v45.27,92.32 v41.5,96.09 | v18.33,80.11 v23.9,74.54
D+
  Top 0.254: U3.4 28.66,30.06 28.66,29.9 25.69,26.94 25.69,26.22 R4.1
D+1
  Top 0.254: U4.4 83.27,30.06 83.27,29.9 80.3,26.94 80.3,26.22 R12.1
D+2
  Top 0.254: U7.4 83.27,84.67 83.27,84.51 80.3,81.55 80.3,80.83 R20.1
D+3
  Top 0.254: U10.4 28.66,84.67 28.66,84.51 25.69,81.55 25.69,80.83 R28.1
D-
  Top 0.254: U3.3 28.21,30.32 28.21,30.17 25.06,27.03 24.35,27.03 R5.1
D-1
  Top 0.254: U4.3 82.82,30.32 82.82,30.17 79.67,27.03 78.96,27.03 R13.1
D-2
  Top 0.254: U7.3 82.82,84.93 82.82,84.78 79.67,81.64 78.96,81.64 R21.1
D-3
  Top 0.254: U10.3 28.21,84.93 28.21,84.78 25.06,81.64 24.35,81.64 R29.1
GND  (via drill 0.38, 0.51)
  Top 0.254: U1.2 v23,31.97 21.47,30.44 20.93,30.44 C7.1 | U2.2 v45.45,34.66 | U3.23 36.41,32.86 U3.EPAD | U3.5 32.17,32.86 U3.EPAD | U3.EPAD 30.05,32.86 U3.43 27.98,34.93 27.76,34.93 C3.1 | U3.35 32.88,35.69 U3.EPAD | U3.33 32.88,36.4 U3.EPAD | U3.15 32.88,31.45 U3.EPAD
  Bottom 0.254: -.1 55.6,40.05 52.63,40.05
  other vias: 32.88,32.86 24.7,22.89 48.14,42.74 41.32,46.15 49.94,28.37 24.35,27.92 42.66,21.28 27.22,25.59 20.21,28.82 23.9,18.49 38.89,28.64 32.79,38.88
  pour Top (isolate 0.305): 17.61,53.52 arc90 17.61,17.6 arc90 53.53,17.6 arc90 53.53,53.52 arc90
  pour Bottom (isolate 0.305): 17.61,53.52 arc90 17.61,17.6 arc90 53.53,17.6 arc90 53.53,53.52 arc90
GND1  (via drill 0.38, 0.51)
  Top 0.254: U5.2 v77.61,31.97 76.08,30.44 75.54,30.44 C15.1 | U6.2 v100.06,34.66 | U4.23 91.02,32.86 U4.EPAD | U4.5 86.78,32.86 U4.EPAD | U4.EPAD 84.66,32.86 U4.43 82.59,34.93 82.37,34.93 C11.1 | U4.35 87.49,35.69 U4.EPAD | U4.33 87.49,36.4 U4.EPAD | U4.15 87.49,31.45 U4.EPAD
  Bottom 0.254: -1.1 110.21,40.05 107.24,40.05
  other vias: 87.49,32.86 79.31,22.89 102.75,42.74 95.93,46.15 104.55,28.37 78.96,27.92 97.27,21.28 81.83,25.59 74.82,28.82 78.51,18.49 93.5,28.64 87.4,38.88
  pour Top (isolate 0.305): 72.22,53.52 arc90 72.22,17.6 arc90 108.14,17.6 arc90 108.14,53.52 arc90
  pour Bottom (isolate 0.305): 72.22,53.52 arc90 72.22,17.6 arc90 108.14,17.6 arc90 108.14,53.52 arc90
GND2  (via drill 0.38, 0.51)
  Top 0.254: U8.2 v77.61,86.58 76.08,85.05 75.54,85.05 C23.1 | U9.2 v100.06,89.27 | U7.23 91.02,87.47 U7.EPAD | U7.5 86.78,87.47 U7.EPAD | U7.EPAD 84.66,87.47 U7.43 82.59,89.54 82.37,89.54 C19.1 | U7.35 87.49,90.3 U7.EPAD | U7.33 87.49,91.01 U7.EPAD | U7.15 87.49,86.06 U7.EPAD
  Bottom 0.254: -2.1 110.21,94.66 107.24,94.66
  other vias: 87.49,87.47 79.31,77.5 102.75,97.35 95.93,100.76 104.55,82.98 78.96,82.53 97.27,75.89 81.83,80.2 74.82,83.43 78.51,73.1 93.5,83.25 87.4,93.49
  pour Top (isolate 0.305): 72.22,108.13 arc90 72.22,72.21 arc90 108.14,72.21 arc90 108.14,108.13 arc90
  pour Bottom (isolate 0.305): 72.22,108.13 arc90 72.22,72.21 arc90 108.14,72.21 arc90 108.14,108.13 arc90
GND3  (via drill 0.38, 0.51)
  Top 0.254: U11.2 v23,86.58 21.47,85.05 20.93,85.05 C31.1 | U12.2 v45.45,89.27 | U10.23 36.41,87.47 U10.EPAD | U10.5 32.17,87.47 U10.EPAD | U10.EPAD 30.05,87.47 U10.43 27.98,89.54 27.76,89.54 C27.1 | U10.35 32.88,90.3 U10.EPAD | U10.33 32.88,91.01 U10.EPAD | U10.15 32.88,86.06 U10.EPAD
  Bottom 0.254: -3.1 55.6,94.66 52.63,94.66
  other vias: 32.88,87.47 24.7,77.5 48.14,97.35 41.32,100.76 49.94,82.98 24.35,82.53 42.66,75.89 27.22,80.2 20.21,83.43 23.9,73.1 38.89,83.25 32.79,93.49
  pour Top (isolate 0.305): 17.61,108.13 arc90 17.61,72.21 arc90 53.53,72.21 arc90 53.53,108.13 arc90
  pour Bottom (isolate 0.305): 17.61,108.13 arc90 17.61,72.21 arc90 53.53,72.21 arc90 53.53,108.13 arc90
MISO  (via drill 0.38)
  Top 0.254: v35.03,25.5 32.52,28.01 32.52,28.41 U3.11
  Bottom 0.254: v35.03,25.5 35.03,24.24 31.89,21.1 v30.09,21.1
MISO1  (via drill 0.38)
  Top 0.254: v89.64,25.5 87.13,28.01 87.13,28.41 U4.11
  Bottom 0.254: v89.64,25.5 89.64,24.24 86.5,21.1 v84.7,21.1
MISO2  (via drill 0.38)
  Top 0.254: v89.64,80.11 87.13,82.62 87.13,83.02 U7.11
  Bottom 0.254: v89.64,80.11 89.64,78.85 86.5,75.71 v84.7,75.71
MISO3  (via drill 0.38)
  Top 0.254: v35.03,80.11 32.52,82.62 32.52,83.02 U10.11
  Bottom 0.254: v35.03,80.11 35.03,78.85 31.89,75.71 v30.09,75.71
MOSI  (via drill 0.38)
  Top 0.254: U3.10 31.44,28.6 31.44,27.65 31.53,27.57 v31.53,26.49
  Bottom 0.254: v31.53,26.49 31.53,24.69 28.03,21.19 v26.5,21.1
MOSI1  (via drill 0.38)
  Top 0.254: U4.10 86.05,28.6 86.05,27.65 86.14,27.57 v86.14,26.49
  Bottom 0.254: v86.14,26.49 86.14,24.69 82.64,21.19 v81.11,21.1
MOSI2  (via drill 0.38)
  Top 0.254: U7.10 86.05,83.21 86.05,82.26 86.14,82.18 v86.14,81.1
  Bottom 0.254: v86.14,81.1 86.14,79.3 82.64,75.8 v81.11,75.71
MOSI3  (via drill 0.38)
  Top 0.254: U10.10 31.44,83.21 31.44,82.26 31.53,82.18 v31.53,81.1
  Bottom 0.254: v31.53,81.1 31.53,79.3 28.03,75.8 v26.5,75.71
N$1
  Top 0.254: LED2.C 29.72,24.18 R6.1
N$2
  Top 0.254: S1.2 29.82,41.3 30.54,41.3 32.52,43.28 33.59,43.28 36.02,40.86 38.27,40.86 43.11,36.01 43.11,35.65 U2.3
N$3
  Top 0.254: R1.1 LED1.A
N$4
  Top 0.254: U1.1 23.63,34.43 23.63,35.99 LED1.C
N$5
  Top 0.254: Y1.1 39.6,29.63 38.62,29.63 37.73,28.73 37.01,28.73 U3.17
N$6
  Top 0.254: U1.5 25.4,30.91 R2.2
N$7
  Top 0.254: Y1.3 38.45,27.39 37.65,27.39 U3.16
N$8
  Top 0.254: U2.4 44.3,31.67 C1.1
N$9  (via drill 0.38)
  Top 0.254: U3.12 34.22,27.98 v34.22,27.57
  Bottom 0.254: D11.1 30.89,30 33.33,27.57 v34.22,27.57
N$10  (via drill 0.38)
  Top 0.254: U3.30 36.02,37.42 36.02,37.8 v36.47,38.25 | v32.88,41.84 31.53,40.5 28.84,40.5 27.49,39.15 v26.59,39.15
  Bottom 0.254: v36.47,38.25 v32.88,41.84 | v26.59,39.15 19.41,39.15 17.35,41.21 D10.1
N$11  (via drill 0.38)
  Top 0.254: U3.29 35.93,36.62 36.65,36.64 v37.37,37.35
  Bottom 0.254: v37.37,37.35 35.39,37.35 30.9,41.84 29.28,41.84 D9.1
N$12  (via drill 0.38)
  Top 0.254: U3.19 36.9,30.26 37.28,30.26 v38.71,31.7 | v41.05,33.85 41.5,34.3 41.5,35.02 40.33,36.19 40.33,36.37 v37.46,39.24 | v31.98,49.93 33.77,51.72 39.16,51.72 41.22,53.78 D5.1
  Bottom 0.254: v38.71,31.7 40.87,33.85 v41.05,33.85 | v37.46,39.24 31.98,44.72 v31.98,49.93
N$13  (via drill 0.38)
  Top 0.254: U3.18 36.91,29.54 37.64,29.54 38.44,30.35 39.34,30.35 v39.7,30.71 | v41.95,32.95 42.22,33.22 42.22,35.38 39.34,38.25 v39.34,38.61
  Bottom 0.254: v39.7,30.71 v41.95,32.95 | v39.34,38.61 39.16,38.79 39.16,40.95 33.77,46.33 33.77,49.93 29.92,53.78 D6.1
N$14  (via drill 0.38)
  Top 0.254: U3.41 28.3,36.03 v28.3,36.72 | v44.64,29 46.71,31.07 56.23,31.07 56.76,30.54 A5.1
  Bottom 0.254: v28.3,36.72 30.36,34.66 40.42,34.66 40.87,35.11 41.23,35.11 44.91,31.43 44.91,31.07 43.92,30.08 43.92,29.72 v44.64,29
N$15  (via drill 0.38)
  Top 0.254: U3.40 29.19,35.84 v29.19,37.62
  Bottom 0.254: v29.19,37.62 31.44,35.38 39.61,35.29 40.33,35.29 41.05,36.01 41.23,36.01 46.71,30.53 46.71,29.99 45.81,29.09 45.81,25.32 A4.1
N$16  (via drill 0.38)
  Top 0.254: U3.39 29.73,36.01 29.73,36.9 30,37.17 30,38.07 v30.45,38.52 | A3.1 40.96,19.39 40.33,20.02 40.33,20.56 45.81,26.04 v46.89,26.04
  Bottom 0.254: v30.45,38.52 30,38.07 30.36,37.71 30.36,37.35 31.8,35.92 40.24,35.92 41.05,36.72 41.23,36.72 47.42,30.53 47.42,29.45 46.89,28.91 v46.89,26.04
N$17  (via drill 0.38)
  Top 0.254: U3.38 30.27,36.17 30.27,36.72 v31.26,37.71 | v48.14,28.37 46.98,27.21 46.08,27.21 39.97,21.1 39.25,21.1 36.65,18.5 32.88,18.5 29.92,15.54 A2.1 30.01,14.37
  Bottom 0.254: v31.26,37.71 32.52,36.46 40.06,36.46 41.05,37.44 41.41,37.44 48.14,30.71 v48.14,28.37
N$18
  Top 0.254: R8.1 34.8,40.59 34.66,40.59 LED4.A
N$19
  Top 0.254: X1.D- 21.65,22.56 21.65,23.25 21.38,23.52 21.38,24.06 R5.2
N$20
  Top 0.254: X1.D+ 22.46,22.45 22.46,22.99 R4.2
N$21
  Top 0.254: LED3.C 31.52,22.38 R7.1
N$22
  Top 0.254: S3.2 84.43,41.3 85.15,41.3 87.13,43.28 88.21,43.28 90.63,40.86 92.88,40.86 97.72,36.01 97.72,35.65 U6.3
N$23
  Top 0.254: R9.1 LED5.A
N$24
  Top 0.254: U5.1 78.24,34.43 78.24,35.99 LED5.C
N$25
  Top 0.254: U5.5 80,30.91 R10.2
N$26
  Top 0.254: U6.4 98.91,31.67 C9.1
N$27  (via drill 0.38)
  Top 0.254: U4.12 88.83,27.98 v88.83,27.57
  Bottom 0.254: D8.1 85.5,30 87.94,27.57 v88.83,27.57
N$28  (via drill 0.38)
  Top 0.254: U4.30 90.63,37.42 90.63,37.8 v91.08,38.25 | v87.49,41.84 86.14,40.5 83.44,40.5 82.1,39.15 v81.2,39.15
  Bottom 0.254: v91.08,38.25 v87.49,41.84 | v81.2,39.15 74.02,39.15 71.96,41.21 D7.1
N$29  (via drill 0.38)
  Top 0.254: U4.29 90.54,36.62 91.26,36.64 v91.98,37.35
  Bottom 0.254: v91.98,37.35 90,37.35 85.51,41.84 83.89,41.84 D3.1
N$30  (via drill 0.38)
  Top 0.254: U4.41 82.91,36.03 v82.91,36.72 | v99.25,29 101.32,31.07 110.84,31.07 111.37,30.54 A7.1
  Bottom 0.254: v82.91,36.72 84.97,34.66 95.03,34.66 95.48,35.11 95.84,35.11 99.52,31.43 99.52,31.07 98.53,30.08 98.53,29.72 v99.25,29
N$31  (via drill 0.38)
  Top 0.254: U4.40 83.8,35.84 v83.8,37.62
  Bottom 0.254: v83.8,37.62 86.05,35.38 94.22,35.29 94.94,35.29 95.66,36.01 95.84,36.01 101.32,30.53 101.32,29.99 100.42,29.09 100.42,25.32 A8.1
N$32  (via drill 0.38)
  Top 0.254: U4.39 84.34,36.01 84.34,36.9 84.61,37.17 84.61,38.07 v85.06,38.52 | A6.1 95.57,19.39 94.94,20.02 94.94,20.56 100.42,26.04 v101.5,26.04
  Bottom 0.254: v85.06,38.52 84.61,38.07 84.97,37.71 84.97,37.35 86.41,35.92 94.85,35.92 95.66,36.72 95.84,36.72 102.03,30.53 102.03,29.45 101.5,28.91 v101.5,26.04
N$33  (via drill 0.38)
  Top 0.254: U4.38 84.88,36.17 84.88,36.72 v85.87,37.71 | v102.75,28.37 101.59,27.21 100.69,27.21 94.58,21.1 93.86,21.1 91.26,18.5 87.49,18.5 84.53,15.54 A1.1 84.62,14.37
  Bottom 0.254: v85.87,37.71 87.13,36.46 94.67,36.46 95.66,37.44 96.02,37.44 102.75,30.71 v102.75,28.37
N$34
  Top 0.254: X2.D- 76.26,22.56 76.26,23.25 75.99,23.52 75.99,24.06 R13.2
N$35
  Top 0.254: X2.D+ 77.07,22.45 77.07,22.99 R12.2
N$36
  Top 0.254: LED6.C 84.33,24.18 R14.1
N$37
  Top 0.254: LED7.C 86.13,22.38 R15.1
N$38
  Top 0.254: Y2.1 94.21,29.63 93.23,29.63 92.34,28.73 91.62,28.73 U4.17
N$39
  Top 0.254: Y2.3 93.06,27.39 92.26,27.39 U4.16
N$40  (via drill 0.38)
  Top 0.254: U4.19 91.5,30.26 91.89,30.26 v93.32,31.7 | v95.66,33.85 96.11,34.3 96.11,35.02 94.94,36.19 94.94,36.37 v92.07,39.24 | v86.59,49.93 88.38,51.72 93.77,51.72 95.83,53.78 D2.1
  Bottom 0.254: v93.32,31.7 95.48,33.85 v95.66,33.85 | v92.07,39.24 86.59,44.72 v86.59,49.93
N$41  (via drill 0.38)
  Top 0.254: U4.18 91.52,29.54 92.25,29.54 93.05,30.35 93.95,30.35 v94.31,30.71 | v96.56,32.95 96.83,33.22 96.83,35.38 93.95,38.25 v93.95,38.61
  Bottom 0.254: v94.31,30.71 v96.56,32.95 | v93.95,38.61 93.77,38.79 93.77,40.95 88.38,46.33 88.38,49.93 84.53,53.78 D4.1
N$42
  Top 0.254: R16.1 89.41,40.59 89.27,40.59 LED8.A
N$43
  Top 0.254: S5.2 84.43,95.91 85.15,95.91 87.13,97.89 88.21,97.89 90.63,95.47 92.88,95.47 97.72,90.62 97.72,90.26 U9.3
N$44
  Top 0.254: R17.1 LED9.A
N$45
  Top 0.254: U8.1 78.24,89.04 78.24,90.6 LED9.C
N$46
  Top 0.254: U8.5 80,85.52 R18.2
N$47
  Top 0.254: U9.4 98.91,86.28 C17.1
N$48  (via drill 0.38)
  Top 0.254: U7.12 88.83,82.59 v88.83,82.18
  Bottom 0.254: D17.1 85.5,84.61 87.94,82.18 v88.83,82.18
N$49  (via drill 0.38)
  Top 0.254: U7.30 90.63,92.03 90.63,92.41 v91.08,92.86 | v87.49,96.45 86.14,95.11 83.44,95.11 82.1,93.76 v81.2,93.76
  Bottom 0.254: v91.08,92.86 v87.49,96.45 | v81.2,93.76 74.02,93.76 71.96,95.82 D16.1
N$50  (via drill 0.38)
  Top 0.254: U7.29 90.54,91.23 91.26,91.25 v91.98,91.96
  Bottom 0.254: v91.98,91.96 90,91.96 85.51,96.45 83.89,96.45 D14.1
N$51  (via drill 0.38)
  Top 0.254: U7.41 82.91,90.64 v82.91,91.33 | v99.25,83.61 101.32,85.68 110.84,85.68 111.37,85.15 A11.1
  Bottom 0.254: v82.91,91.33 84.97,89.27 95.03,89.27 95.48,89.72 95.84,89.72 99.52,86.04 99.52,85.68 98.53,84.69 98.53,84.33 v99.25,83.61
N$52  (via drill 0.38)
  Top 0.254: U7.40 83.8,90.45 v83.8,92.23
  Bottom 0.254: v83.8,92.23 86.05,89.99 94.22,89.9 94.94,89.9 95.66,90.62 95.84,90.62 101.32,85.14 101.32,84.6 100.42,83.7 100.42,79.93 A12.1
N$53  (via drill 0.38)
  Top 0.254: U7.39 84.34,90.62 84.34,91.51 84.61,91.78 84.61,92.68 v85.06,93.13 | A10.1 95.57,74 94.94,74.63 94.94,75.17 100.42,80.65 v101.5,80.65
  Bottom 0.254: v85.06,93.13 84.61,92.68 84.97,92.32 84.97,91.96 86.41,90.53 94.85,90.53 95.66,91.33 95.84,91.33 102.03,85.14 102.03,84.06 101.5,83.52 v101.5,80.65
N$54  (via drill 0.38)
  Top 0.254: U7.38 84.88,90.78 84.88,91.33 v85.87,92.32 | v102.75,82.98 101.59,81.81 100.69,81.81 94.58,75.71 93.86,75.71 91.26,73.11 87.49,73.11 84.53,70.15 A9.1 84.62,68.98
  Bottom 0.254: v85.87,92.32 87.13,91.06 94.67,91.06 95.66,92.05 96.02,92.05 102.75,85.32 v102.75,82.98
N$55
  Top 0.254: X3.D- 76.26,77.17 76.26,77.86 75.99,78.13 75.99,78.67 R21.2
N$56
  Top 0.254: X3.D+ 77.07,77.06 77.07,77.59 R20.2
N$57
  Top 0.254: LED10.C 84.33,78.79 R22.1
N$58
  Top 0.254: LED11.C 86.13,76.99 R23.1
N$59
  Top 0.254: Y3.1 94.21,84.24 93.23,84.24 92.34,83.34 91.62,83.34 U7.17
N$60
  Top 0.254: Y3.3 93.06,82 92.26,82 U7.16
N$61  (via drill 0.38)
  Top 0.254: U7.19 91.5,84.87 91.89,84.87 v93.32,86.31 | v95.66,88.46 96.11,88.91 96.11,89.63 94.94,90.8 94.94,90.97 v92.07,93.85 | v86.59,104.53 88.38,106.33 93.77,106.33 95.83,108.39 D13.1
  Bottom 0.254: v93.32,86.31 95.48,88.46 v95.66,88.46 | v92.07,93.85 86.59,99.33 v86.59,104.53
N$62  (via drill 0.38)
  Top 0.254: U7.18 91.52,84.15 92.25,84.15 93.05,84.96 93.95,84.96 v94.31,85.32 | v96.56,87.56 96.83,87.83 96.83,89.99 93.95,92.86 v93.95,93.22
  Bottom 0.254: v94.31,85.32 v96.56,87.56 | v93.95,93.22 93.77,93.4 93.77,95.56 88.38,100.94 88.38,104.53 84.53,108.39 D15.1
N$63
  Top 0.254: R24.1 89.41,95.2 89.27,95.2 LED12.A
N$64
  Top 0.254: S7.2 29.82,95.91 30.54,95.91 32.52,97.89 33.59,97.89 36.02,95.47 38.27,95.47 43.11,90.62 43.11,90.26 U12.3
N$65
  Top 0.254: R25.1 LED13.A
N$66
  Top 0.254: U11.1 23.63,89.04 23.63,90.6 LED13.C
N$67
  Top 0.254: U11.5 25.4,85.52 R26.2
N$68
  Top 0.254: U12.4 44.3,86.28 C25.1
N$69  (via drill 0.38)
  Top 0.254: U10.12 34.22,82.59 v34.22,82.18
  Bottom 0.254: D23.1 30.89,84.61 33.33,82.18 v34.22,82.18
N$70  (via drill 0.38)
  Top 0.254: U10.30 36.02,92.03 36.02,92.41 v36.47,92.86 | v32.88,96.45 31.53,95.11 28.84,95.11 27.49,93.76 v26.59,93.76
  Bottom 0.254: v36.47,92.86 v32.88,96.45 | v26.59,93.76 19.41,93.76 17.35,95.82 D22.1
N$71  (via drill 0.38)
  Top 0.254: U10.29 35.93,91.23 36.65,91.25 v37.37,91.96
  Bottom 0.254: v37.37,91.96 35.39,91.96 30.9,96.45 29.28,96.45 D20.1
N$72  (via drill 0.38)
  Top 0.254: U10.41 28.3,90.64 v28.3,91.33 | v44.64,83.61 46.71,85.68 56.23,85.68 56.76,85.15 A15.1
  Bottom 0.254: v28.3,91.33 30.36,89.27 40.42,89.27 40.87,89.72 41.23,89.72 44.91,86.04 44.91,85.68 43.92,84.69 43.92,84.33 v44.64,83.61
N$73  (via drill 0.38)
  Top 0.254: U10.40 29.19,90.45 v29.19,92.23
  Bottom 0.254: v29.19,92.23 31.44,89.99 39.61,89.9 40.33,89.9 41.05,90.62 41.23,90.62 46.71,85.14 46.71,84.6 45.81,83.7 45.81,79.93 A16.1
N$74  (via drill 0.38)
  Top 0.254: U10.39 29.73,90.62 29.73,91.51 30,91.78 30,92.68 v30.45,93.13 | A14.1 40.96,74 40.33,74.63 40.33,75.17 45.81,80.65 v46.89,80.65
  Bottom 0.254: v30.45,93.13 30,92.68 30.36,92.32 30.36,91.96 31.8,90.53 40.24,90.53 41.05,91.33 41.23,91.33 47.42,85.14 47.42,84.06 46.89,83.52 v46.89,80.65
N$75  (via drill 0.38)
  Top 0.254: U10.38 30.27,90.78 30.27,91.33 v31.26,92.32 | v48.14,82.98 46.98,81.81 46.08,81.81 39.97,75.71 39.25,75.71 36.65,73.11 32.88,73.11 29.92,70.15 A13.1 30.01,68.98
  Bottom 0.254: v31.26,92.32 32.52,91.06 40.06,91.06 41.05,92.05 41.41,92.05 48.14,85.32 v48.14,82.98
N$76
  Top 0.254: X4.D- 21.65,77.17 21.65,77.86 21.38,78.13 21.38,78.67 R29.2
N$77
  Top 0.254: X4.D+ 22.46,77.06 22.46,77.59 R28.2
N$78
  Top 0.254: LED14.C 29.72,78.79 R30.1
N$79
  Top 0.254: LED15.C 31.52,76.99 R31.1
N$80
  Top 0.254: Y4.1 39.6,84.24 38.62,84.24 37.73,83.34 37.01,83.34 U10.17
N$81
  Top 0.254: Y4.3 38.45,82 37.65,82 U10.16
N$82  (via drill 0.38)
  Top 0.254: U10.19 36.9,84.87 37.28,84.87 v38.71,86.31 | v41.05,88.46 41.5,88.91 41.5,89.63 40.33,90.8 40.33,90.97 v37.46,93.85 | v31.98,104.53 33.77,106.33 39.16,106.33 41.22,108.39 D19.1
  Bottom 0.254: v38.71,86.31 40.87,88.46 v41.05,88.46 | v37.46,93.85 31.98,99.33 v31.98,104.53
N$83  (via drill 0.38)
  Top 0.254: U10.18 36.91,84.15 37.64,84.15 38.44,84.96 39.34,84.96 v39.7,85.32 | v41.95,87.56 42.22,87.83 42.22,89.99 39.34,92.86 v39.34,93.22
  Bottom 0.254: v39.7,85.32 v41.95,87.56 | v39.34,93.22 39.16,93.4 39.16,95.56 33.77,100.94 33.77,104.53 29.92,108.39 D21.1
N$84
  Top 0.254: R32.1 34.8,95.2 34.66,95.2 LED16.A
RESET  (via drill 0.38, 0.51)
  Top 0.254: U3.13 35.93,26.98 v35.93,26.4 | v26.95,22.62 26.41,22.62 25.06,21.28 25.06,20.92 26.32,19.66 26.86,19.66 28.03,20.83 28.75,20.83 30.81,18.76 32.07,18.76 R3.2 33.26,19.9 33.77,19.39 35.57,19.39 v38.27,22.09 42.76,26.58 43.83,26.58 S2.3
  Bottom 0.254: v26.95,22.62 25.96,23.61 25.96,24.15 v26.5,24.69 | v35.93,26.4 38.27,24.06 v38.27,22.09
RESET1  (via drill 0.38, 0.51)
  Top 0.254: U4.13 90.54,26.98 v90.54,26.4 | v81.56,22.62 81.02,22.62 79.67,21.28 79.67,20.92 80.93,19.66 81.47,19.66 82.64,20.83 83.36,20.83 85.42,18.76 86.68,18.76 R11.2 87.87,19.9 88.38,19.39 90.18,19.39 v92.88,22.09 97.37,26.58 98.44,26.58 S4.3
  Bottom 0.254: v81.56,22.62 80.57,23.61 80.57,24.15 v81.11,24.69 | v90.54,26.4 92.88,24.06 v92.88,22.09
RESET2  (via drill 0.38, 0.51)
  Top 0.254: U7.13 90.54,81.59 v90.54,81.01 | v81.56,77.23 81.02,77.23 79.67,75.89 79.67,75.53 80.93,74.27 81.47,74.27 82.64,75.44 83.36,75.44 85.42,73.37 86.68,73.37 R19.2 87.87,74.51 88.38,74 90.18,74 v92.88,76.7 97.37,81.19 98.44,81.19 S6.3
  Bottom 0.254: v81.56,77.23 80.57,78.22 80.57,78.76 v81.11,79.3 | v90.54,81.01 92.88,78.67 v92.88,76.7
RESET3  (via drill 0.38, 0.51)
  Top 0.254: U10.13 35.93,81.59 v35.93,81.01 | v26.95,77.23 26.41,77.23 25.06,75.89 25.06,75.53 26.32,74.27 26.86,74.27 28.03,75.44 28.75,75.44 30.81,73.37 32.07,73.37 R27.2 33.26,74.51 33.77,74 35.57,74 v38.27,76.7 42.76,81.19 43.83,81.19 S8.3
  Bottom 0.254: v26.95,77.23 25.96,78.22 25.96,78.76 v26.5,79.3 | v35.93,81.01 38.27,78.67 v38.27,76.7
RX_LED
  Top 0.254: U3.8 30.36,28.93 30.36,28.37 29.37,27.39 29.37,26.79 R6.2
RX_LED1
  Top 0.254: U4.8 84.97,28.93 84.97,28.37 83.98,27.39 83.98,26.79 R14.2
RX_LED2
  Top 0.254: U7.8 84.97,83.54 84.97,82.98 83.98,82 83.98,81.4 R22.2
RX_LED3
  Top 0.254: U10.8 30.36,83.54 30.36,82.98 29.37,82 29.37,81.4 R30.2
SCK  (via drill 0.38)
  Top 0.254: U3.9 30.9,28.77 30.9,27.65 v30.54,27.3
  Bottom 0.254: v28.3,22.9 30.54,25.14 v30.54,27.3
SCK1  (via drill 0.38)
  Top 0.254: U4.9 85.51,28.77 85.51,27.65 v85.15,27.3
  Bottom 0.254: v82.91,22.9 85.15,25.14 v85.15,27.3
SCK2  (via drill 0.38)
  Top 0.254: U7.9 85.51,83.38 85.51,82.26 v85.15,81.91
  Bottom 0.254: v82.91,77.5 85.15,79.75 v85.15,81.91
SCK3  (via drill 0.38)
  Top 0.254: U10.9 30.9,83.38 30.9,82.26 v30.54,81.91
  Bottom 0.254: v28.3,77.5 30.54,79.75 v30.54,81.91
TX_LED  (via drill 0.38)
  Top 0.254: v33.51,24.51 R7.2 | v41.86,29.27 40.96,30.17 40.96,30.71 38.8,32.86 37.69,32.86 U3.22
  Bottom 0.254: v33.51,24.51 34.04,25.05 34.04,25.95 35.39,27.3 39.88,27.3 v41.86,29.27
TX_LED1  (via drill 0.38)
  Top 0.254: v88.12,24.51 R15.2 | v96.47,29.27 95.57,30.17 95.57,30.71 93.41,32.86 92.3,32.86 U4.22
  Bottom 0.254: v88.12,24.51 88.65,25.05 88.65,25.95 90,27.3 94.49,27.3 v96.47,29.27
TX_LED2  (via drill 0.38)
  Top 0.254: v88.12,79.12 R23.2 | v96.47,83.88 95.57,84.78 95.57,85.32 93.41,87.47 92.3,87.47 U7.22
  Bottom 0.254: v88.12,79.12 88.65,79.66 88.65,80.56 90,81.91 94.49,81.91 v96.47,83.88
TX_LED3  (via drill 0.38)
  Top 0.254: v33.51,79.12 R31.2 | v41.86,83.88 40.96,84.78 40.96,85.32 38.8,87.47 37.69,87.47 U10.22
  Bottom 0.254: v33.51,79.12 34.04,79.66 34.04,80.56 35.39,81.91 39.88,81.91 v41.86,83.88
USER_LED
  Top 0.254: R8.2 34.76,38.22 34.76,37.58 U3.32
USER_LED1
  Top 0.254: R16.2 89.37,38.22 89.37,37.58 U4.32
USER_LED2
  Top 0.254: R24.2 89.37,92.83 89.37,92.19 U7.32
USER_LED3
  Top 0.254: R32.2 34.76,92.83 34.76,92.19 U10.32
V_BATT  (via drill 0.51)
  Top 0.254: U1.3 20.66,32.96 20.66,33.22 v22.55,35.11 | D1.A 50.48,37.89 49.94,37.89 48.41,39.42 46.23,39.42 JP1.2 43.18,38.16 41.95,38.16 C8.2 36.65,41.84 36.11,41.84 33.15,44.81 32.97,44.81 30.9,42.74 30.18,42.74 28.75,44.18 28.03,44.18 23,39.15 23,38.25 v24.35,36.9
  Bottom 0.254: v22.55,35.11 v24.35,36.9
V_BATT1  (via drill 0.51)
  Top 0.254: U5.3 75.27,32.96 75.27,33.22 v77.16,35.11 | D12.A 105.09,37.89 104.55,37.89 103.02,39.42 100.84,39.42 JP4.2 97.79,38.16 96.56,38.16 C16.2 91.26,41.84 90.72,41.84 87.76,44.81 87.58,44.81 85.51,42.74 84.79,42.74 83.36,44.18 82.64,44.18 77.61,39.15 77.61,38.25 v78.96,36.9
  Bottom 0.254: v77.16,35.11 v78.96,36.9
V_BATT2  (via drill 0.51)
  Top 0.254: U8.3 75.27,87.57 75.27,87.83 v77.16,89.72 | D18.A 105.09,92.5 104.55,92.5 103.02,94.03 100.84,94.03 JP7.2 97.79,92.77 96.56,92.77 C24.2 91.26,96.45 90.72,96.45 87.76,99.42 87.58,99.42 85.51,97.35 84.79,97.35 83.36,98.79 82.64,98.79 77.61,93.76 77.61,92.86 v78.96,91.51
  Bottom 0.254: v77.16,89.72 v78.96,91.51
V_BATT3  (via drill 0.51)
  Top 0.254: U11.3 20.66,87.57 20.66,87.83 v22.55,89.72 | D24.A 50.48,92.5 49.94,92.5 48.41,94.03 46.23,94.03 JP10.2 43.18,92.77 41.95,92.77 C32.2 36.65,96.45 36.11,96.45 33.15,99.42 32.97,99.42 30.9,97.35 30.18,97.35 28.75,98.79 28.03,98.79 23,93.76 23,92.86 v24.35,91.51
  Bottom 0.254: v22.55,89.72 v24.35,91.51

## Text on the board
Bottom: v11 | v11 | v11 | v11
Dimension: Route Out | Route Out | Route Out | Route Out | Route Out | Route Out | Route Out | Route Out | Route Out
tPlace: 3 | 2 | 3 | 2 | 9 | + | 9 | + | ON | ON | CHG | CHG | 10 | - | 10 | - | A5 | A5 | 11 | 11 | RX | RX | TX | A4 | TX | A4 | A2 | A3 | A2 | A3 | 3 | 3 | 2 | 2 | 9 | + | 9 | + | ON | ON | CHG | - | CHG | - | 10 | 10 | A5 | A5 | 11 | 11 | RX | RX | A4 | A4 | TX | TX | A2 | A3 | A2 | A3